# Altium PCB BLE_CAMERA_hv2.PcbDoc
Units mm, origin at the board's own origin, x right, y up, seen from the top; angles counter-clockwise.
Board outline 84 x 32 mm, 2 copper layers (Top Layer, Bottom Layer); 82 components, 53 nets, 243 pads, 235 vias.
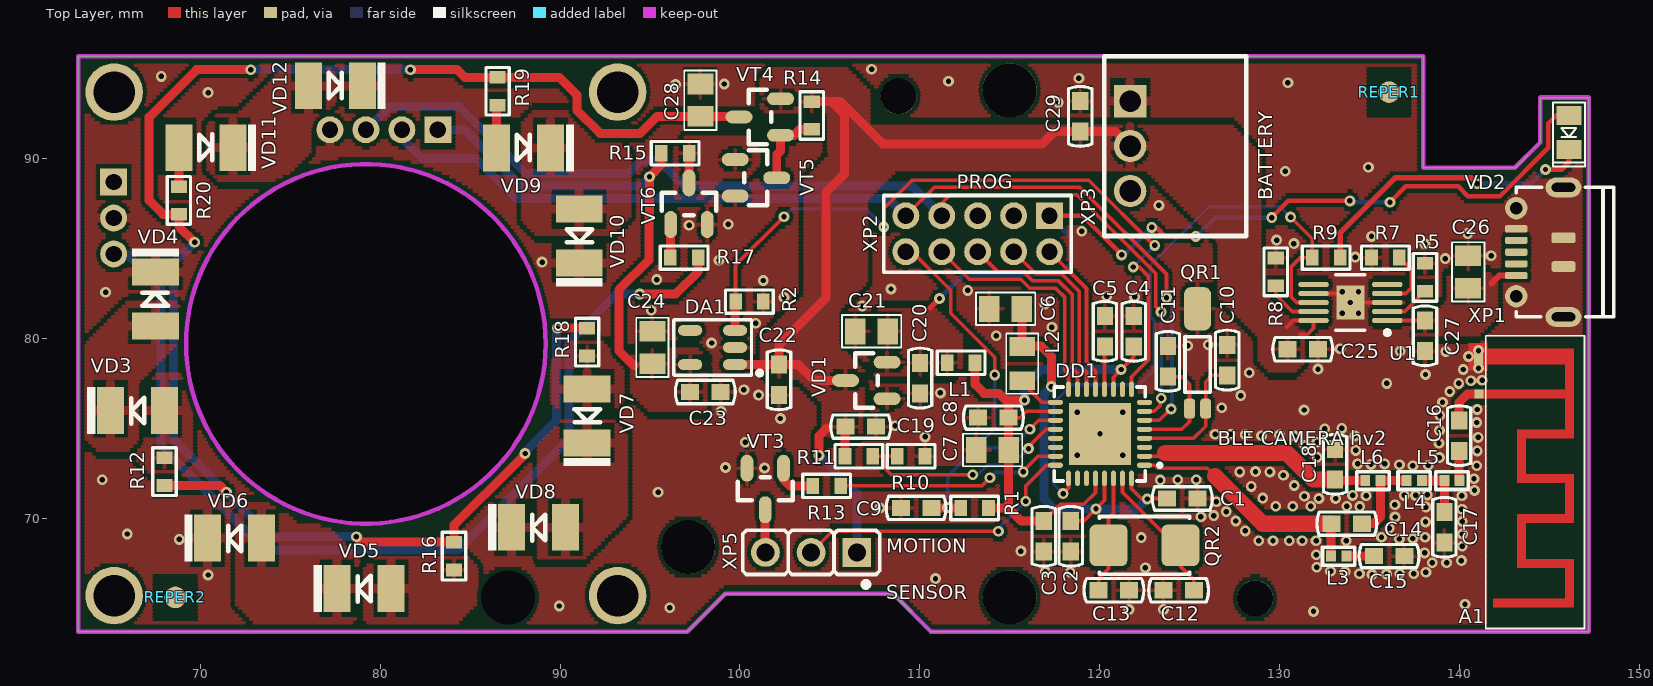
[diagram p0: Top Layer view]
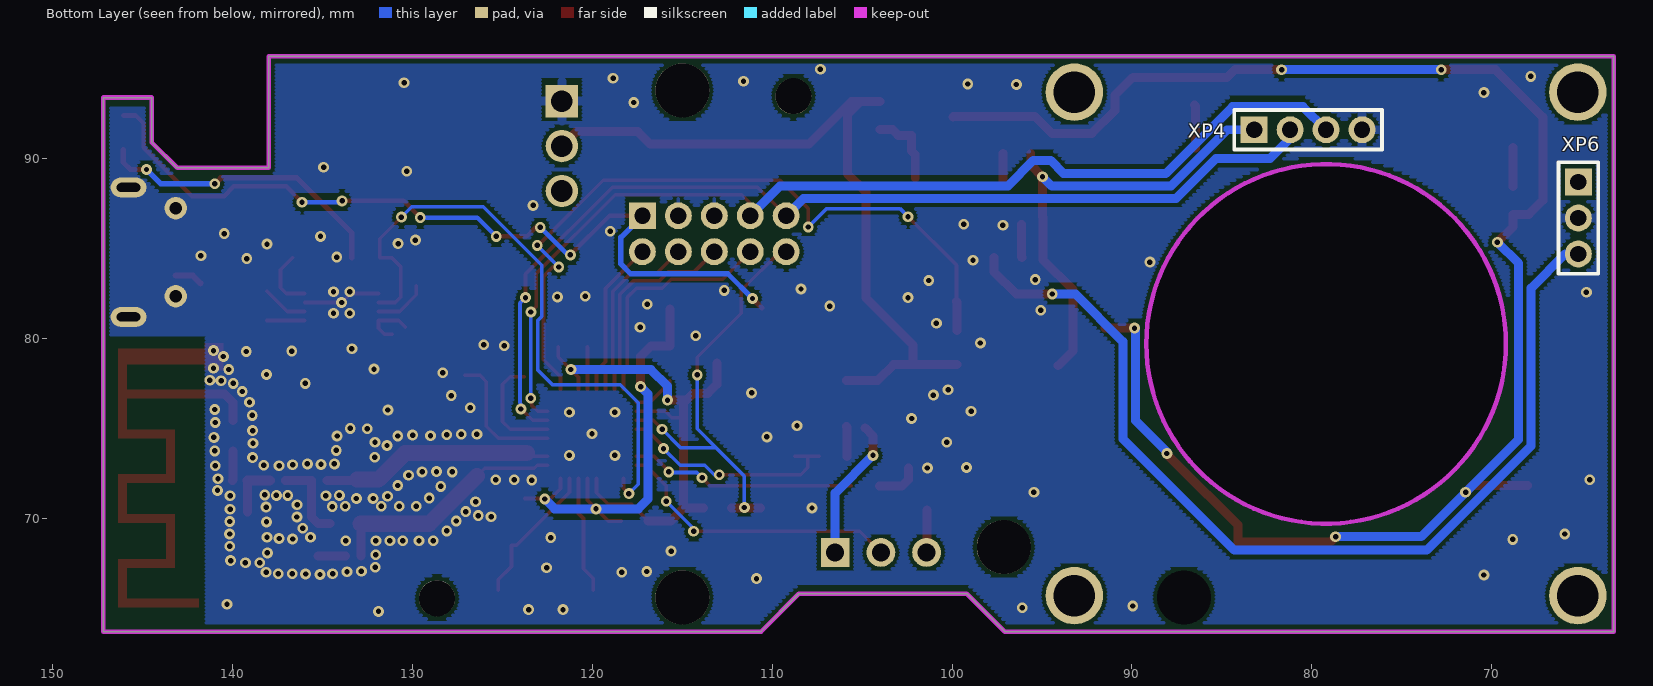
[diagram p1: Bottom Layer view, seen from below]
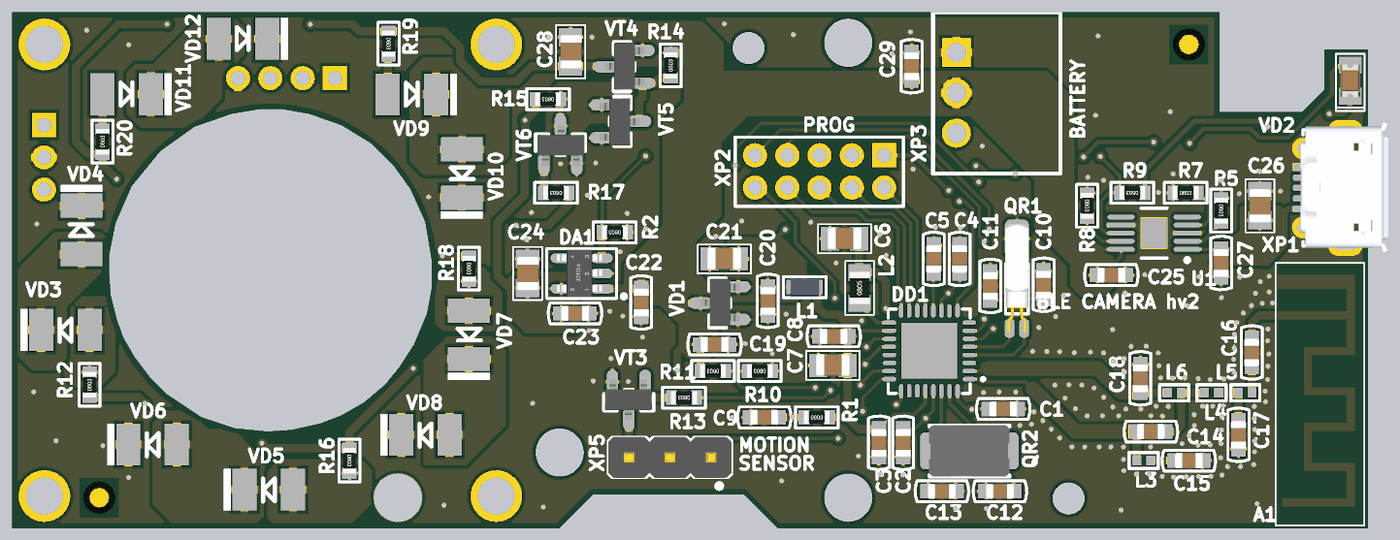
[diagram p2: 3D render of the assembled board from above, using the file's embedded part models]

## Layer stack, top to bottom
Top Solder: solder mask 0.0102, Solder Resist, Dk 3.5
Top Layer: signal copper 0.0356
Dielectric 1: dielectric 0.32, FR-4, Dk 4.8
Bottom Layer: signal copper 0.0356
Bottom Solder: solder mask 0.0102, Solder Resist, Dk 3.5

## Board outline
63.2,63.7 63.2,95.7 138,95.7 138,89.5 143.1,89.5 144.5,90.9 144.5,93.4 147.2,93.4 147.2,63.7 110.625,63.7 108.525,65.8 99.175,65.8 97.075,63.7
cut-out: 69.2,80.6 69.6,82.6 70.6,84.9 72.4,87.1 74.5,88.6 76.8,89.4 78.6,89.7 79.9,89.7 81.6,89.4 83.6,88.7 85.4,87.6 86.9,86.1 87.9,84.7 88.8,82.7 89.2,80.3 89.2,78.6 88.9,77 88.1,75.1 87.2,73.7 86.3,72.6 85,71.5 83.6,70.7 82.3,70.2 80.5,69.8 79,69.7 77,69.9 74.9,70.6 72.8,72 71.7,73.1 70.8,74.3 70.1,75.5 69.7,76.6 69.3,78.2 69.2,79.7

## Design rules (kind name [scope] priority, off if disabled: settings)
Clearance [All] p1: gap=0.2 ignorepadtopadclearanceinfootprint=FALSE
ComponentClearance [All] p1: gap=0.05 collisioncheckmode=3 verticalgap=2540 showdistances=FALSE
HoleSize [All] p1: absolutevalues=TRUE maxlimit=5 minlimit=0.025 maxpercent=80.000 minpercent=20.000
HoleToHoleClearance [All] p1: gap=0.05 allowstackedmicrovias=TRUE
MinimumSolderMaskSliver [All] p1: minsoldermaskwidth=0.05
PolygonConnect POWER [InComponent('XP3') OR InComponent('VD3')  OR InComponent('VD4') OR InComponent('VD5') OR InComponent('VD6') OR InComponent('VD7') OR InComponent('VD8') OR InComponent('VD9') OR InComponent('VD10') OR InComponent('VD11') OR InComponent('VD12') OR InComponent('XP6')  OR InComponent('XP4')] p1: connectstyle=Relief reliefconductorwidth=0.5 reliefentries=4 polygonreliefangle="90 Angle" airgapwidth=0.2
PolygonConnect DIRECT [IsVia OR InComponent('U1') AND InNet('GND') OR InComponent('XP1') AND InNet('GND')] p2: connectstyle=Direct reliefconductorwidth=0.254 reliefentries=4 polygonreliefangle="90 Angle" airgapwidth=0.254
PolygonConnect [All] p3: connectstyle=Relief reliefconductorwidth=0.2 reliefentries=4 polygonreliefangle="90 Angle" airgapwidth=0.2
RoutingVias [All] p1: holewidth=0.4 width=0.8 viastyle="Through Hole" minholewidth=0.3 minwidth=0.6 maxholewidth=0.5 maxwidth=1
ShortCircuit ShortCircuit_1 [InComponent('A1')] p1: allowed=TRUE
ShortCircuit [All] p2: allowed=FALSE
SilkToSilkClearance [All] p1: silktosilkclearance=0.05
SilkToSolderMaskClearance [IsPad] p1: minsilkscreentomaskgap=0.05 clearancetoexposedcopper=TRUE
SolderMaskExpansion [All] p1: expansion=0.102
Width [All] p1: maxlimit=5 minlimit=0.2 preferedwidth=0.5
23 further rules are at their usual default settings.

## Classes and differential pairs
component class [8]-IR_BACKLIGHT: C28 R12 R14 R15 R16 R17 R18 R19 R20 VD3 VD4 VD5 VD6 VD7 VD8 VD9 VD10 VD11 VD12 VT4 VT5 VT6
component class [7]-CONNECTORS: C29 R10 R11 R13 VT3 XP2 XP3 XP4 XP5 XP6
component class [6]-CHARGER: C25 C26 C27 R5 R7 R8 R9 U1 VD2 XP1
component class [5]-POWER: C19 C20 C21 C22 C23 C24 DA1 R2 VD1
component class [4]-RF: A1 C14 C15 C16 C17 C18 L3 L4 L5 L6 REPER1 REPER2
component class [3]-BLE: C1 C2 C3 C4 C5 C6 C7 C8 C9 C10 C11 C12 C13 DD1 L1 L2 QR1 QR2 R1

## Components (designator, comment, footprint, x,y, rotation, side; value= is the part's Value field where it differs from the comment)
A1 "Antenna Wi-Fi" Antenna_WiFi 141.1,76.9 r270 top locked
C1 "0.1uF" CC0603 124.6,71.1 r0 top
C2 "0.1uF" CC0603 118.4,69 r270 top
C3 "0.1uF" CC0603 116.9,69 r90 top
C4 "0.1uF" CC0603 121.9,80.4 r270 top
C5 "1uF" CC0603 120.3,80.398 r90 top
C6 "10uF" CC0805 114.775,81.65 r0 top
C7 "10uF" CC0805 114.05,73.8 r0 top
C8 "0.1uF" CC0603 114.1,75.6 r0 top
C9 "0.1uF" CC0603 109.8,70.575 r0 top
C10 "22pF" CC0603 127.1,78.8 r90 top
C11 "22pF" CC0603 123.8,78.726 r90 top
C12 "22pF" CC0603 124.4,66 r180 top
C13 "22pF" CC0603 120.8,66 r0 top
C14 "1pF" CC0603 133.75,69.7 r0 top
C15 "6.8pF" CC0603 136.1,67.9 r180 top
C16 "12pF" CC0603 140,74.6 r90 top
C17 "1pF" CC0603 139.175,69.5 r270 top
C18 "1pF" CC0603 133.1,73 r90 top
C19 "1uF" CC0603 106.72,75.1 r180 top
C20 "1uF" CC0603 110.02,77.8 r90 top
C21 "10uF" CC0805 107.32,80.4 r0 top
C22 "1uF" CC0603 102.175,77.7 r90 top
C23 "1uF" CC0603 98.075,77.025 r180 top
C24 "10uF" CC0805 95.132,79.5 r270 top
C25 "1uF" CC0603 131.3,79.4 r0 top
C26 "10uF" CC0805 140.5,83.7 r270 top
C27 "0.1uF" CC0603 138.1,80.15 r90 top
C28 "10uF" CC0805 97.8,93.25 r270 top
C29 "0.1uF" CC0603 118.925,92.35 r90 top
DA1 "AP2139-3.3" SOT23-5 98.457,79.5 r0 top
DD1 "CC2650" QFN32_TI 122.5,72.95 r180 top
L1 "BLM18HE152SN1" L0603 112.3,78.65 r0 top
L2 "10uH" RC0805 115.7,78.6 r90 top
L3 "2.4nH" L0402 133.3,67.9 r180 top
L4 "2nH" L0402 137.5,72.1 r0 top
L5 "2nH" L0402 139.6,72.1 r0 top
L6 "2.4nH" L0402 135.2,72.1 r0 top
QR1 "MS3V-T1R" MS3V-T1R 125,76.1 r90 top
QR2 "SJK-6L-24.0" AC5032_2 122.5,68.5 r180 top
R1 "100k" RC0603 113.05,70.575 r0 top
R2 "470k" RC0603 100.532,82.05 r180 top
R5 "1k" RC0603 138.1,83.4 r270 top
R7 "2k" RC0603 135.9,84.5 r0 top
R8 "10k" RC0603 129.8,83.7 r270 top
R9 "1k" RC0603 132.6,84.5 r180 top
R10 "470k" RC0603 109.52,73.45 r180 top
R11 "470k" RC0603 106.62,73.45 r180 top
R12 "10E" RC0603 68,72.6 r90 top
R13 "47k" RC0603 104.824,71.8 r180 top
R14 "10k" RC0603 104,92.4 r90 top
R15 "100k" RC0603 96.4,90.3 r180 top
R16 "10E" RC0603 84.1,67.9 r270 top
R17 "100k" RC0603 96.9,84.5 r180 top
R18 "10E" RC0603 91.5,79.8 r270 top
R19 "10E" RC0603 86.525,93.75 r270 top
R20 "10E" RC0603 68.8,87.675 r90 top
REPER1 "REPER1.2" REPER1.2 136.1,93.7 r90 top
REPER2 "REPER1.2" REPER1.2 68.6,65.6 r90 top
U1 "BQ24092DGQR" DGQ10-1675X1445TP_N 133.95,82 r180 top
VD1 "AP2138-3.3" SOT-23(123) 107.02,77.7 r0 top
VD2 "LED_0805" LED0805 146.1,91.5 r90 top
VD3 "SFH4211-Z" LED_3528 68,76 r270 top
VD4 "SFH4211-Z" LED_3528 67.5,80.7 r180 top
VD5 "SFH4211-Z" LED_3528 80.6,66.1 r270 top
VD6 "SFH4211-Z" LED_3528 73.4,68.9 r270 top
VD7 "SFH4211-Z" LED_3528 91.5,77.2 r0 top
VD8 "SFH4211-Z" LED_3528 90.3,69.5 r270 top
VD9 "SFH4211-Z" LED_3528 86.475,90.6 r90 top
VD10 "SFH4211-Z" LED_3528 91.062,87.2 r0 top
VD11 "SFH4211-Z" LED_3528 68.8,90.612 r90 top
VD12 "SFH4211-Z" LED_3528 76,94.05 r90 top
VT3 "BC817-40" SOT-23(123) 101.375,71.625 r90 top
VT4 "IRLML6402" SOT-23(123) 101.1,92.35 r0 top
VT5 "BC817-40" SOT-23(123) 100.9,88.9 r180 top
VT6 "BC817-40" SOT-23(123) 97.2,87.5 r270 top
XP1 "KLS1-238" KLS1-238 145.725,84.775 r0 top locked
XP2 "PLD2-10" PLD2-10 117.225,86.8 r270 top
XP3 "MW03R" MW03R 121.7,93.2 r270 top locked
XP4 "n.p" PLS2-04 83.194,91.61 r180 bottom locked
XP5 "n.p" PLS-03 106.5,68.1 r180 top
XP6 "PLS2-03" PLS2-03 65.175,88.7 r270 bottom locked value=n.p

## Footprints (in the part's own frame and the unit in brackets; to place one, negate y for a bottom-side part, rotate by r counter-clockwise, add the part's x,y. Pads: shape width x height; smd on the part's side, far side on the other; paste and mask are expansions set on the pad)
AC5032_2 [mm]
  rrect30% 2.1x2.3 smd mask+0.05: 1(-2,0) 2(2,0)
  silkscreen extent -2.5,-1.6 2.5,1.6, body extent -2.5,-1.6 2.5,1.6, height 1.2
Antenna_WiFi [mm] "2.43Ghz 2.5dBi"
  rect 0.5x0.5 smd paste-10 mask+0.05: 1(0,0)
  rect 0.9x0.5 smd paste-10 mask+0.05: 2(-2.1,-0.025)
  Top Layer region: -2.55,0.1 -1.65,0.1 -1.65,4.9 -2.55,4.9
  Top Layer region: -2.55,4.775 2.45,4.775 2.45,5.275 -2.55,5.275
  Top Layer region: -0.25,-0.2 0.25,-0.2 0.25,4.9 -0.25,4.9
  Top Layer region: 1.95,2.125 2.45,2.125 2.45,4.9 1.95,4.9
  Top Layer region: 2.3,2.125 4.6,2.125 4.6,2.625 2.3,2.625
  Top Layer region: 4.45,2.125 4.95,2.125 4.95,4.9 4.45,4.9
  Top Layer region: 4.45,4.775 7.15,4.775 7.15,5.275 4.45,5.275
  Top Layer region: 6.65,2.125 7.15,2.125 7.15,5 6.65,5
  Top Layer region: 6.9,2.125 9.4,2.125 9.4,2.625 6.9,2.625
  Top Layer region: 9.15,2.125 9.65,2.125 9.65,4.9 9.15,4.9
  Top Layer region: 9.15,4.775 11.85,4.775 11.85,5.275 9.15,5.275
  Top Layer region: 11.35,0.775 11.85,0.775 11.85,5 11.35,5
  silkscreen extent -3.25,0.38 13.03,5.87
CC0603 [mm]
  rect 1x0.9 smd paste-25.4 mask+0.05: 1(-0.85,0) 2(0.85,0)
  silkscreen extent -1.66,-0.65 1.66,0.65, body extent -0.87,-0.47 0.88,0.48, height 0.85
CC0805 [mm]
  rect 1.15x1.45 smd paste-25.4 mask+0.05: 1(-0.9,0) 2(0.9,0)
  silkscreen extent -1.65,-0.9 1.65,0.9, body extent -1.05,-0.65 1.05,0.7, height 1.1
DGQ10-1675X1445TP_N [mm] "TSSOP, 10-Leads, Body 3x3mm, Pitch 0.5mm, Thermal Pad 1.88x1.57mm, IPC Medium Density"
  oval 1.7x0.3 smd mask+0.05: 1(-2.05,1) 2(-2.05,0.5) 3(-2.05,0) 4(-2.05,-0.5) 5(-2.05,-1) 6(2.05,-1) 7(2.05,-0.5) 8(2.05,0) 9(2.05,0.5) 10(2.05,1)
  rect 1.57x1.88 smd mask+0.05: 11(0,0)
  silkscreen extent -2.17,-1.55 0.8,1.8, body extent -1.55,-1.55 1.55,1.55, height 1.1
KLS1-238 [mm]
  rrect50% 1.25x0.4 smd mask+0.05: 1(-2.55,-1.275) 2(-2.55,-0.625) 3(-2.55,0.025) 4(-2.55,0.675) 5(-2.55,1.325)
  round 1.25 hole 0.7 mask+0.05: 6(-2.55,-2.425) 6(-2.55,2.475)
  oval 2x1.1 hole 0.5 slot 1.3 at 0 deg mask+0.05: 6(0.075,-3.575) 6(0.075,3.625)
  rrect50% 1.35x0.6 smd mask+0.05: 6(0.075,-0.775) 6(0.075,0.825)
  silkscreen extent -2.55,-3.57 2.87,3.63, body extent -2.7,-4.02 2.73,4.18, height 2.68
L0402 [mm]
  rect 0.55x0.6 smd mask+0.05: 1(-0.425,0) 2(0.425,0)
  silkscreen extent -0.9,-0.5 0.9,0.5
L0603 [mm]
  rect 0.7x0.9 smd paste-25.4 mask+0.05: 1(-0.775,0) 2(0.774,0)
  silkscreen extent -1.32,-0.65 1.33,0.65, body extent -0.9,-0.58 0.9,0.54, height 1
LED0805 [mm]
  rect 1.05x1.4 smd paste-25.4 mask+0.05: 1(0.9,0) 2(-1,0)
  silkscreen extent -1.93,-0.89 1.62,0.89, body extent -1.06,-0.62 0.96,0.63, height 1.1
LED_3528 [mm]
  rect 2.6x1.5 smd mask+0.05: 1(0,0) 2(0,-3)
  silkscreen extent -1.3,-4.3 1.3,-1.12, body extent -1.3,-3.03 1.3,0.2, height 2.1
MS3V-T1R [mm]
  rrect50% 1.1x0.6 smd mask+0.05: 1(0,0) 2(0,-0.9)
  rrect50% 2.4x1.5 smd mask+0.05: 3(5.55,-0.45)
  silkscreen extent 0.9,-1.15 4,0.25, body extent -0.25,-1.19 6.45,0.29, height 1.48
MW03R [mm]
  rect 1.8x1.8 hole 1.2 mask+0.05: 1(0,0)
  round 1.8 hole 1.2 mask+0.05: 2(2.5,0) 3(5,0)
  silkscreen extent -2.5,-1.45 7.5,6.45
PLD2-10 [mm]
  rect 1.5x1.5 hole 0.9 mask+0.05: 1(-0.025,0)
  round 1.5 hole 0.9 mask+0.05: 2(1.975,0) 3(-0.025,-2) 4(1.975,-2) 5(-0.025,-4) 6(1.975,-4) 7(-0.025,-6) 8(1.975,-6) 9(-0.025,-8) 10(1.975,-8)
  silkscreen extent -1.15,-9.23 3.13,1.2
PLS2-03 [mm]
  rect 1.5x1.5 hole 0.9 mask+0.05: 1(0,0)
  round 1.5 hole 0.9 mask+0.05: 2(2,0) 3(4,0)
  silkscreen extent -1.1,-1.1 5.1,1.1
PLS2-04 [mm]
  rect 1.5x1.5 hole 0.9 mask+0.05: 1(-0.006,-0.002)
  round 1.5 hole 0.9 mask+0.05: 2(1.994,-0.002) 3(3.994,-0.002) 4(5.994,-0.002)
  silkscreen extent -1.11,-1.1 7.1,1.1
PLS-03 [mm]
  rect 1.6x1.6 hole 1 mask+0.05: 1(0,0)
  round 1.6 hole 1 mask+0.05: 2(2.54,0) 3(5.08,0)
  silkscreen extent -1.27,-1.23 6.35,1.93, body extent -1.27,-1.27 6.35,1.27, height 10.1
QFN32_TI [mm]
  oval 0.85x0.28 smd mask+0.05: 1(0,0) 2(0,-0.5) 3(0,-1) 4(0,-1.5) 5(0,-2) 6(0,-2.5) 7(0,-3) 8(0,-3.5) 17(4.95,-3.5) 18(4.95,-3) 19(4.95,-2.5) 20(4.95,-2) 21(4.95,-1.5) 22(4.95,-1) 23(4.95,-0.5) 24(4.95,0)
  oval 0.28x0.85 smd mask+0.05: 9(0.725,-4.225) 10(1.225,-4.225) 11(1.725,-4.225) 12(2.225,-4.225) 13(2.725,-4.225) 14(3.225,-4.225) 15(3.725,-4.225) 16(4.225,-4.225) 25(4.225,0.725) 26(3.725,0.725) 27(3.225,0.725) 28(2.725,0.725) 29(2.225,0.725) 30(1.725,0.725) 31(1.225,0.725) 32(0.725,0.725)
  rect 3.45x3.45 smd mask+0.05: 33(2.475,-1.75)
  silkscreen extent -0.95,-4.35 5.02,0.87
RC0603 [mm]
  rect 0.7x0.9 smd paste-25.4 mask+0.05: 1(-0.775,0) 2(0.774,0)
  silkscreen extent -1.32,-0.65 1.33,0.65, body extent -0.8,-0.4 0.8,0.4, height 0.45
RC0805 [mm]
  rect 1.05x1.4 smd paste-25.4 mask+0.05: 1(-0.95,0) 2(0.95,0)
  silkscreen extent -1.67,-0.89 1.67,0.89, body extent -1,-0.62 1,0.63, height 0.6
REPER1.2 [mm]
  round 1.2 smd paste-25.4 mask+0.05: 1(0,0)
  Top Layer pour cut-out: -1.35,-1.325 1.325,-1.325 1.325,1.325 -1.35,1.325
SOT23-5 [mm]
  oval 1.35x0.6 smd mask+0.05: 1(1.275,-0.95) 2(1.275,0) 3(1.275,0.95) 4(-1.225,0.95) 5(-1.225,-0.95)
  silkscreen extent -2.13,-1.55 2.77,1.55, body extent -1.5,-1.42 1.3,1.47, height 1.09
SOT-23(123) [mm]
  oval 1.5x0.713 smd mask+0.05: 1(1.162,-1.05) 2(1.162,0.982) 3(-1.149,-0.034)
  silkscreen extent -0.62,-1.56 0.65,1.49, body extent -1.18,-1.46 1.3,1.46, height 1

## Part data
A1: "2.43GHz"
C1 C2 C3 C4 C5 C8 C9 C10 C11 C12 C13 C14 C15 C16 C17 C18 C19 C20 C22 C23 C25 C27 C29: library part CC0603, "CC0603"
C6 C7 C21 C24 C26 C28: library part CC0805, "CC0805"
DA1: library part AP2139
DD1: library part CC2650RHB, "CC2650RHBT"
L1: library part L0603, "L0603"
L2: library part L0805, "L0805"
L3 L4 L5 L6: library part L0402, "L0402"
QR1: "CRYSTAL_32768 Hz"
QR2: library part AC5032_2, "AC5032/2"
R1 R2 R5 R7 R8 R9 R10 R11 R12 R13 R14 R15 R16 R17 R18 R19 R20: library part RC0603, "RC0603"
U1: "1 A, Single-Input, Single-Cell Li-Ion Battery Charger with Operation Over JEITA and 10 k ohm NTC, 4.5 V, -40 to 150 degC, 10-pin MSOP-PowerPAD (DGQ), Green (RoHS & no Sb/Br)", Manufacturer="Texas Instruments", Over Voltage Protection=N, Supplier Part Number 1=BQ24092DGQR-ND, Code_JEDEC=MO-187-BA-T, ComponentLink1Description=Datasheet, ComponentLink1URL=http://www.ti.com/general/docs/lit/getliterature.tsp?genericPartNumber=BQ24092&fileType=pdf, DatasheetVersion=SLUS968C, Eco-Plan="Green (RoHS & no Sb/Br)", Lead Acid=N, Li-Ion=N, Li-Polymer=N, Mounting Technology="Surface Mount", NiCd=N, NiMH=N, PackageDescription="10-Pin PowerPAD Plastic Small Outline 0.5 mm Pitch, Exposed Pad", PackageReference=DGQ10-1675X1445TP, PackageVersion="revF, Nov-2011", PartNumber=BQ24092DGQR, SubFamily="Battery Charge Management", Supplier 1=Digi-Key, Supplier 2=Newark, Supplier 3=Mouser, Supplier Part Number 2=79R7874, Supplier Part Number 3=595-BQ24092DGQR, Vin(Min)(V)=4.5
VD1: library part AP2138
VD3 VD4 VD5 VD6 VD7 VD8 VD9 VD10 VD11 VD12: library part LED_3528
VT3 VT5 VT6: library part BC846BLT1, "NPN 500ma transistor", ComponentField7="Published 29-Sep-2000", OriginalName=BC846BLT1
VT4: "HEXFET Power MOSFET", ComponentField7="Published 8-Jun-2000", OriginalName=IRLML5103
XP1: library part "MicroUSB KLS1-238"
XP4: library part PLS2-04, "PLS2-04"
XP5: library part PLS03, "PLS03"

## Free pads (board coordinates)
  round 3.2 hole 2.3 mask+0.05: 0(65.2,65.7) 0(65.2,93.7) 0(93.2,65.7) 0(93.2,93.7)
  round 1.524 hole 3 mask+0.05: 0(87.1,65.6)
  round 3 hole 3 unplated mask+0.05: 0(97.125,68.4) 0(115,65.6) 0(115,93.8)
  round 2 hole 2 unplated mask+0.05: 0(108.825,93.475) 0(128.65,65.55)

## Via types
v1: diameter 0.6, hole 0.3, Top Layer to Bottom Layer, tented both sides, 235 vias

## Nets (pads, with @x,y where several pads share a name; then routed paths per layer and width w, separated by ;. In a path a pad name is that pad's centre, name@x,y a point inside that pad or via, vN(x,y) a via of type N, cw(c..) or ccw(c..) an arc to the next point about the centre after c; other vN are vias at no path point)
+3V3: C20.2 C21.2 L1.1 VD1.2 VD2.1 XP2.1 | length 46.7
  Top Layer w0.254: XP2.1 119.05,86.825 v1(121.225,84.65) ; v1(122.906,86.179) 123.146,86.179 123.65,85.675 v1(125.35,85.675) ; v1(129.575,86.725) 130.5,87.65 v1(133.925,87.65) ; v1(136.15,87.575) 137.032,88.457 139.943,88.457 140.482,87.918 142.268,87.918 144.954,90.604 144.954,91.954 145.4,92.4 VD2.1
  Top Layer w0.3: 110.575,81.7 v1(111.1,82.225)
  Bottom Layer w0.254: v1(121.225,84.65) 121.375,84.65 122.904,86.179 v1(122.906,86.179) ; v1(125.35,85.675) 126.4,86.725 v1(129.575,86.725) ; v1(133.925,87.65) 134,87.575 v1(136.15,87.575)
  Bottom Layer w0.3: v1(111.1,82.225) 112.475,83.6 117.875,83.6 118.425,84.15 118.425,85.625 XP2.1
+3V3_CAM: C23.2 C24.2 DA1.5 R15.2 XP4.1 | length 26.4
  Top Layer w0.5: 94.107,78.497 93.275,79.329 93.275,82.7 94.95,84.375 94.95,86.725 94.975,86.75 v1(94.975,89) 95.626,89.651 R15.2
  Bottom Layer w0.5: XP4.1 84.707,91.608 87.84,88.475 94.45,88.475 v1(94.975,89)
+3V3_F: C3.2 C4.2 C7.2 C8.2 DD1.11 DD1.18 DD1.28 L1.2 R1.2 | length 30.2
  Top Layer w0.2: C8.2 115.587,75.6 115.937,75.95 DD1.18 ; C3.2 117.825,70.775 119.125,70.775 119.775,71.425 DD1.28 ; DD1.11 120.775,77.85 121.9,78.975 C4.2
  Top Layer w0.5: L1.2 113.074,77.451 113.575,76.95 114.4,76.95 114.775,76.575 ; R1.2 114.925,70.575 114.95,70.55 ; v1(115.825,76.575) 114.775,76.575 ; C3.2 115.65,69.85 114.95,70.55 ; 114.775,76.575 114.95,76.4 C8.2 C7.2 114.95,70.55
  Bottom Layer w0.5: v1(115.825,76.575) 115.825,77.35 116.75,78.275 v1(121.2,78.275)
+VBAT: C19.2 C22.2 C25.1 C29.1 DA1.1 R11.2 R14.2 U1.10 VD1.3 VT4.2 XP3.2 XP5.1 | length 54.8
  Top Layer w0.2: 130.4,80.625 130.775,81 U1.10 131.9,80.575 131.55,80.225 131.15,80.225
  Top Layer w0.5: DA1.1 C22.2 ; R14.2 105.101,93.174 ; v1(104.4,73.5) 104.4,74.59 104.835,75.025 ; R11.2 105.846,75.075 C19.2 ; VD1.3 104.137,77.666 103.253,78.55 C22.2 ; XP3.2 120.9,91.5 C29.1 117.475,91.5 116.8,90.825 107.95,90.825 105.6,93.174 105.101,93.174 ; C22.2 102.175,79.65 104.775,82.25 104.775,88.125 105.825,89.175 105.825,92.45 105.101,93.174
  Bottom Layer w0.5: v1(104.4,73.5) 106.5,71.4 XP5.1
+VBUS: C26.2 C27.2 U1.1 XP1.1 | length 3.7
  Top Layer w0.2: U1.1 C27.2
  Top Layer w0.35: 141.8,83.075 142.225,83.5 XP1.1
BAT_MEAS: DD1.20 R10.2 R11.1 | length 12.8
  Top Layer w0.2: R11.1 108.025,73.45 ; R10.2 108.025,73.45 ; v1(112.95,72.425) 108.425,72.425 108.025,72.825 108.025,73.45 ; v1(116.05,73.875) 116.05,73.975 117.025,74.95 DD1.20
  Bottom Layer w0.2: v1(112.95,72.425) 113.226,72.425 113.749,72.948 115.123,72.948 v1(116.05,73.875)
BAT_STAT: DD1.25 R9.2 U1.8 | length 35.1
  Top Layer w0.2: v1(117.975,71.375) 118.275,71.675 DD1.25 ; v1(130.625,86.75) 131.826,85.549 R9.2 131.175,84.5 130.65,83.975 130.65,82.325 130.975,82 U1.8
  Bottom Layer w0.2: v1(117.975,71.375) 117.45,71.9 117.45,76.425 118.45,77.425 122.225,77.425 123.031,78.231 123.031,81.02 122.825,81.226 122.825,84.075 126.075,87.325 130.05,87.325 v1(130.625,86.75)
BT_RX: DD1.7 XP2.7 XP4.3 | length 58.8
  Top Layer w0.2: XP2.7 111.225,87.525 111.7,88 118.741,88 123.125,83.616 123.125,81.775 v1(123.425,81.475) ; DD1.7 123.05,75.95 123.375,76.275 123.375,76.623 v1(123.431,76.679)
  Bottom Layer w0.2: v1(123.425,81.475) 123.431,81.469 v1(123.431,76.679)
  Bottom Layer w0.5: XP4.3 80.492,92.9 84.405,92.9 88.13,89.175 93.8,89.175 94.525,89.9 95.475,89.9 96.9,88.475 109.575,88.475 XP2.7
BT_TX: DD1.6 XP2.9 XP4.2 | length 56.8
  Top Layer w0.2: XP2.9 110.8,88.4 118.906,88.4 123.725,83.581 v1(123.725,82.275) ; DD1.6 123.325,75.45 123.954,76.079 v1(123.981,76.079)
  Bottom Layer w0.2: v1(123.725,82.275) 124.031,81.969 124.031,76.43 123.981,76.38 v1(123.981,76.079)
  Bottom Layer w0.5: XP4.2 81.2,91.125 82.325,90 85.325,90 87.55,87.775 108.275,87.775 XP2.9
CAM_EN: DA1.3 DD1.9 R2.2 | length 41.3
  Top Layer w0.2: R2.2 99.758,84.083 v1(102.45,86.775) ; v1(108,86.2) 108,87.225 109.575,88.8 119.403,88.8 123.028,85.175 v1(123.075,85.175) ; DD1.9 121.775,77.872 122.725,78.822 122.725,83.45 122.2,83.975 v1(121.875,83.975)
  Top Layer w0.5: DA1.3 99.732,82.024 R2.2
  Bottom Layer w0.2: v1(102.45,86.775) 102.9,87.225 106.975,87.225 v1(108,86.2) ; v1(121.875,83.975) v1(123.075,85.175)
EX_T: DD1.24 XP5.2 | length 16.2
  Top Layer w0.2: XP5.2 105.135,69.275 v1(114.375,69.275) ; v1(115.9,70.95) 115.9,71.8 117.05,72.95 DD1.24
  Bottom Layer w0.2: v1(114.375,69.275) 114.375,69.425 v1(115.9,70.95)
EX_T_P: DD1.23 R13.1 | length 12.7
  Top Layer w0.2: R13.1 113.45,71.8 v1(113.9,72.25) ; v1(115.756,72.579) 115.756,72.631 116.575,73.45 DD1.23
  Bottom Layer w0.2: v1(113.9,72.25) 114.198,72.548 115.725,72.548 v1(115.756,72.579)
GND: A1.2 C1.2 C2.2 C3.1 C4.1 C5.2 C6.1 C7.1 C8.1 C9.1 C10.2 C11.2 C12.2 C13.2 C15.1 C17.2 C18.2 C19.1 C20.1 C21.1 C22.1 C23.1 C24.1 C25.2 C26.1 C27.1 C28.1 C29.2 DA1.2 DD1.33 QR1.3 R2.1 R5.1 R7.1 R8.1 R10.1 U1.3 U1.7 U1.11 VD1.1 VD4.2 VD6.2 VD8.2 VD10.2 VD12.2 VT3.2 VT5.2 VT6.2 XP1.5 XP1.6 XP2.3 XP2.5 XP3.1 XP4.4 XP6.2 | length 4.3
  Top Layer w0.2: U1.7 133.45,82.5 v1(133.95,82) U1.3
  other v1: 131.9,64.825 121.637,64.925 123.55,64.925 96.1,65.025 89.95,65.125 140.325,65.225 110.875,66.647 70.425,66.85 135.15,66.875 135.95,66.9 134.45,66.917 136.7,66.917 137.475,66.917 118.375,67 138.15,67 116.975,67.042 133.65,67.025 132.85,67.058 122.55,67.25 132.075,67.275 138.5,67.525 139.3,67.525 140.125,67.65 132.05,67.975 138.075,68.075 115.625,68.175 140.175,68.45 128.85,68.75 129.646,68.75 130.55,68.75 131.266,68.75 132.041,68.75 133.725,68.75 68.825,68.825 136.674,68.85 137.425,68.875 122.325,68.925 135.682,68.95 138.1,68.95 65.925,69.125 140.18,69.125 128.1,69.3 136.116,69.45 138.125,69.8 140.175,69.825 127.575,69.85 125.638,70.082 136.434,70.075 126.35,70.15 127.05,70.375 140.15,70.5 107.789,70.575 134.475,70.65 138.15,70.625 129.8,70.675 130.75,70.675 131.75,70.675 133.75,70.675 136.425,70.75 126.5,70.925 132.2,71.1 133.125,71.1 129.075,71.125 131.39,71.225 134.825,71.25 140.15,71.25 134.075,71.275 136.95,71.275 137.575,71.275 138.225,71.3 95.45,71.45 140.85,71.55 128.436,71.775 130.825,71.825 123.375,72.125 64.534,72.15 124.35,72.15 125.375,72.15 140.825,72.2 130.225,72.4 127.8,72.582 128.675,72.6 129.475,72.582 101.375,72.8 99.2,72.825 137.425,72.925 140.975,72.925 138.275,72.95 136.675,72.975 135.094,73 134.35,73.025 135.85,73.025 138.9,73.374 132.108,73.4 118.75,73.5 121.28,73.5 141,73.75 134.25,73.775 131.426,74.05 138.875,74.175 100.3,74.225 132.091,74.225 141.05,74.5 110.3,74.525 130.825,74.575 134.2,74.575 129.008,74.59 130,74.625 128.1,74.65 126.425,74.675 127.3,74.67 120.025,74.7 138.9,74.875 132.525,74.975 133.463,75 108.625,75.15 140.975,75.325 102.25,75.55 138.925,75.725 118.75,75.9 121.28,75.9 98.941,75.95 131.375,76.025 141,76.05 126.8,76.15 139.075,76.45 127.85,76.825 101.041,76.85 111.15,76.975 139.475,77.05 100.225,77.15 135.975,77.5 139.972,77.5 140.65,77.65 141.275,77.675 138.125,78 128.325,78.1 140.225,78.276 132.15,78.3 141.075,78.35 140.525,79 139.248,79.275 136.724,79.3 141.075,79.325 133.375,79.425 124.9,79.6 126.05,79.65 98.425,79.75 114.25,80.15 117.35,80.625 100.875,80.85 133.5,81.4 134.4,81.4 95.075,81.575 106.8,81.8 116.95,81.9 102.45,82.275 121.95,82.312 120.4,82.35 64.725,82.575 133.5,82.6 134.4,82.6 112.675,82.675 108.4,82.75 101.3,83.225 95.37,83.275 89,84.25 98.835,84.35 139.225,84.441 134.225,84.525 141.775,84.606 138.1,85.25 130.809,85.275 129.846,85.47 135.125,85.675 140.475,85.833 119.016,85.96 97.175,86.3 99.35,86.35 123.3,87.4 130.325,89.3 134.95,89.525 117.7,93.125 70.425,93.675 96.425,94.125 99.125,94.15 130.475,94.225 111.6,94.3 118.85,94.475 67.825,94.575 107.325,94.975
JTAG_TCK: DD1.14 XP2.4 | length 10.2
  Top Layer w0.2: XP2.4 116.45,83.6 117.884,83.6 118.875,82.609 118.875,78.534 119.275,78.134 DD1.14
JTAG_TDI: DD1.16 XP2.8 | length 13.1
  Top Layer w0.2: XP2.8 112.75,83.3 115.619,83.3 116.119,82.8 117.55,82.8 118.075,82.275 118.075,78.203 118.275,78.003 DD1.16
JTAG_TDO: DD1.15 XP2.6 | length 11.6
  Top Layer w0.2: XP2.6 114.35,83.7 115.784,83.7 116.284,83.2 117.719,83.2 118.475,82.444 118.475,78.369 118.775,78.069 DD1.15
JTAG_TMS: DD1.13 XP2.2 | length 8.7
  Top Layer w0.2: XP2.2 119.275,82.775 119.275,78.7 119.775,78.2 DD1.13
NetA1_1: A1.1 C16.2 | length 2.3
  Top Layer w0.5: C16.2 140,76.45 140.45,76.9 A1.1
NetC1_1: C1.1 C2.1 C6.2 DD1.29 DD1.32 L2.2 | length 24.6
  Top Layer w0.2: C2.1 119.125,69.85 120.275,71 DD1.29 ; DD1.32 121.775,71.65 122.325,71.1 C1.1
  Top Layer w0.5: C6.2 115.675,79.575 116.75,79.575 117.325,79 v1(117.325,77.325)
  Bottom Layer w0.5: v1(117.325,77.325) 116.9,76.9 116.9,71.075 117.45,70.525 v1(119.8,70.525) 122.1,70.525 v1(122.65,71.075)
NetC5_1: C5.1 DD1.12 | length 2.4
  Top Layer w0.2: DD1.12 120.275,79.523 C5.1
NetC12_1: C12.1 DD1.31 QR2.1 | length 8
  Top Layer w0.2: DD1.31 121.275,71.45 124.225,68.5 QR2.1 124.5,67.325 125.25,66.575 C12.1
NetC13_1: C13.1 DD1.30 QR2.2 | length 6.6
  Top Layer w0.2: C13.1 119.95,66.65 120.5,67.2 QR2.2 120.5,69.991 120.775,70.266 DD1.30
NetC14_2: C14.2 L4.1 L6.2 | length 4.7
  Top Layer w0.5: C14.2 135.25,69.7 135.625,70.075 L6.2 L4.1
NetC15_2: C15.2 L3.1 | length 1.5
  Top Layer w0.5: L3.1 C15.2
NetC16_1: C16.1 L5.2 | length 1.7
  Top Layer w0.5: C16.1 140,72.125 L5.2
NetC17_1: C17.1 L4.2 L5.1 | length 3
  Top Layer w0.5: C17.1 L5.1
  Top Layer w0.55: L4.2 L5.1
NetC28_2: C28.2 R12.1 R16.1 R18.1 R19.1 R20.1 VT4.3 | length 93.8
  Top Layer w0.5: R12.1 71.067,71.825 v1(71.442,71.45) ; v1(69.675,85.35) 68.8,86.225 R20.1 67.925,86.9 67.15,87.675 67.15,92.313 69.787,94.95 v1(72.8,94.95) ; v1(78.675,68.975) 78.975,68.675 R16.1 84.1,69.625 85.767,71.292 85.78,71.292 88.054,73.567 v1(88.054,73.604) ; v1(81.675,94.95) 84.275,94.95 84.7,94.525 R19.1 89.95,94.525 90.95,93.525 90.95,92.675 92.225,91.4 94.45,91.4 95.4,92.35 C28.2 99.917,92.35 VT4.3 ; v1@89.825,80.55 v1@89.85,80.575 ; v1(89.854,80.579) v1@89.85,80.575 ; R18.1 v1@89.85,80.575
  Bottom Layer w0.5: v1(69.675,85.35) 68.5,84.175 68.5,74.392 v1(71.442,71.45) 73.917,68.975 v1(78.675,68.975) ; v1(72.8,94.95) v1(81.675,94.95) ; v1(88.054,73.604) 88.054,73.695 89.798,75.439 89.798,80.573 89.848,80.573 v1(89.854,80.579)
NetDD1_17: DD1.17 L2.1 | length 2.4
  Top Layer w0.2: L2.1 115.7,77.55 116.8,76.45 DD1.17
NetR5_2: R5.2 U1.2 | length 2.6
  Top Layer w0.2: U1.2 136.975,81.5 R5.2
NetR7_2: R7.2 U1.4 | length 3.4
  Top Layer w0.2: U1.4 137.025,82.5 137.35,82.825 137.35,83.824 R7.2
NetR8_2: R8.2 U1.9 | length 3
  Top Layer w0.2: R8.2 129.8,82.425 130.725,81.5 U1.9
NetR9_1: R9.1 VD2.2 | length 16.7
  Top Layer w0.3: R9.1 133.375,85.875 136.434,88.934 140.666,88.934 v1(141,88.6) ; v1(144.8,89.4) 145.7,89.4 146.1,89.8 VD2.2
  Bottom Layer w0.3: v1(141,88.6) 144,88.6 v1(144.8,89.4)
NetR12_2: R12.2 VD3.1
NetR13_2: R13.2 VT3.1 | length 2.4
  Top Layer w0.5: VT3.1 102.425,72.15 102.775,71.8 R13.2
NetR14_1: R14.1 VT4.1 VT5.3 | length 4.3
  Top Layer w0.5: VT5.3 102.049,90.224 102.262,90.437 VT4.1 103.001,91.3 103.326,91.625 R14.1
NetR15_1: R15.1 VT5.1 VT6.3 | length 1.7
  Top Layer w0.5: VT6.3 97.166,90.291 R15.1
NetR16_2: R16.2 VD5.1
NetR17_1: R17.1 XP6.3 | length 54.8
  Top Layer w0.5: v1(94.425,82.475) 96.425,82.475 97.675,83.725 R17.1
  Bottom Layer w0.5: XP6.3 65.9,84.7 67.8,82.8 67.8,74.031 73.606,68.225 84.3,68.225 90.498,74.423 90.498,79.825 93.148,82.475 v1(94.425,82.475)
NetR17_2: R17.2 VT6.1 | length 1.8
  Top Layer w0.5: R17.2 96.15,84.524 VT6.1
NetR18_2: R18.2 VD7.1
NetR19_2: R19.2 VD9.1 | length 2.4
  Top Layer w0.5: VD9.1 86.475,92.926 R19.2
NetR20_2: R20.2 VD11.1 | length 2.2
  Top Layer w0.5: R20.2 VD11.1
NetVD3_2: VD3.2 VD4.1
NetVD5_2: VD5.2 VD6.1
NetVD7_2: VD7.2 VD8.1
NetVD9_2: VD9.2 VD10.1
NetVD11_2: VD11.2 VD12.1
NetVT3_3: VT3.3 XP5.3 | length 2.4
  Top Layer w0.5: VT3.3 101.409,68.111 XP5.3
RESET: C9.2 DD1.19 R1.1 XP2.10 | length 24.2
  Top Layer w0.2: XP2.10 109.575,84.825 111.725,82.675 111.725,81.4 114.175,78.95 v1(114.175,77.975) ; v1(116.125,74.95) 116.625,75.45 DD1.19
  Top Layer w0.5: C9.2 R1.1
  Bottom Layer w0.2: v1(111.55,70.6) 111.55,72.35 113.125,73.925 ; v1(114.175,77.975) 114.175,74.975 113.125,73.925 ; v1(116.125,74.95) 115.1,73.925 113.125,73.925
RF_N: C18.1 DD1.2 L6.1 | length 13
  Top Layer w0.2: DD1.2 123.475,73.45 123.65,73.625
  Top Layer w0.5: C18.1 133.15,72.1 L6.1
  Top Layer w0.9: 123.65,73.625 130.425,73.625 131.9,72.15 C18.1
RF_P: C14.1 DD1.1 L3.2 | length 13.6
  Top Layer w0.2: DD1.1 123.075,72.95 123.238,72.787 125.988,72.787 126.425,72.35
  Top Layer w0.5: L3.2 132.875,69.675 C14.1
  Top Layer w0.9: 126.425,72.35 129.075,69.7 C14.1
X32K_Q1: C10.1 DD1.4 QR1.2 | length 7.5
  Top Layer w0.2: DD1.4 125.225,74.45 125.9,75.125 QR1.2 125.9,77.6 126.25,77.95 C10.1
X32K_Q2: C11.1 DD1.5 QR1.1 | length 6.1
  Top Layer w0.2: DD1.5 124.575,74.95 125,75.375 QR1.1 125,77.45 124.575,77.876 C11.1
pads on no net: DA1.4 DD1.3 DD1.8 DD1.10 DD1.21 DD1.22 DD1.26 DD1.27 REPER1.1 REPER2.1 U1.5 U1.6 XP1.2 XP1.3 XP1.4 XP3.3 XP6.1

## Polygon pours and split planes (outlines as drawn)
GND on Top Layer "GND_L01_P036" (hatched Horizontal grid 0.2 track 0.2, remove dead copper, pour order 36): 147.2,63.7 63.2,63.7 63.2,95.7 147.2,95.7
+VBAT on Top Layer "+VBAT_L01_P024" (hatched Horizontal grid 0.2 track 0.2, remove dead copper, pour order 24): 120.725,91.975 106.75,91.975 103.6,88.825 103.6,84.025 104.525,83.1 106.475,83.1 107.05,83.675 107.05,87.7 108.7,89.35 120.675,89.35
NetR15_1 on Top Layer "NETR15_1_L01_P034" (hatched Horizontal grid 0.2 track 0.2, remove dead copper, pour order 34): 97.8,87.65 99.05,88.9 100.325,88.9 101.075,89.65 101.075,90.5 100.3,91.275 97.05,91.275 96.357,90.582 96.357,87.868 96.575,87.65
+3V3 on Top Layer "+3V3_L01_P032" (hatched Horizontal grid 0.2 track 0.2, remove dead copper, pour order 32): 111.775,77.825 112.325,78.375 112.325,80.2 110.875,81.65 107.8,81.65 107.35,81.2 107.35,78.15 107.675,77.825
+VBAT on Top Layer "+VBAT_L01_P030" (hatched Horizontal grid 0.2 track 0.2, remove dead copper, pour order 30): 104.925,92.425 104.925,90.2 107.2,91.725 107.2,93.775 105.925,95.05 101.75,95.05 101.175,94.475 101.175,92.825 101.575,92.425
+3V3_CAM on Top Layer "+3V3_CAM_L01_P028" (hatched Horizontal grid 0.2 track 0.2, remove dead copper, pour order 28): 98.15,78.9 97.55,79.5 94.337,79.5 93.95,79.113 93.95,76.975 95.05,75.875 98.1,75.875 98.1,76.2 98.15,76.25
+VBAT on Top Layer "+VBAT_L01_P026" (hatched Horizontal grid 0.2 track 0.2, remove dead copper, pour order 26): 103.6,84.025 103.6,82.425 101.2,80.025 101.2,78.175 101.75,77.625 103.375,77.625 104.6,76.4 104.6,74.825 105.1,74.325 106.425,74.325 106.875,74.775 106.875,78.225 105.475,79.625 105.475,81.525 107.05,83.1 107.05,83.675
+VBAT on Top Layer "+VBAT_L01_P022" (hatched Horizontal grid 0.2 track 0.2, remove dead copper, pour order 22): 130.175,81.4 128.925,82.65 128.925,90.275 127.225,91.975 120.725,91.975 120.075,91.325 120.075,89.95 120.675,89.35 122.6,89.35 126.625,85.325 126.625,82.3 128.85,80.075 128.85,78.775 129.475,78.15 130.85,78.15 131.35,78.65 131.35,80.4 130.55,81.2 130.275,81.3
+VBUS on Top Layer "+VBUS_L01_P020" (hatched Horizontal grid 0.2 track 0.2, remove dead copper, pour order 20): 141.7,83.625 142.1,83.225 142.1,81.2 140.975,80.075 137.675,80.075 137.375,80.375 137.375,81.4 137.75,81.775 139.025,81.775 139.375,82.125 139.375,83.575 139.425,83.625
NetVD9_2 on Top Layer "NETVD9_2_L01_P016" (hatched Horizontal grid 0.2 track 0.2, remove dead copper, pour order 16): 88.738,85.7 87.9,86.538 87.9,92 88.7,92.8 91.361,92.8 93.9,90.261 93.9,86.8 92.8,85.7
NetR18_2 on Top Layer "NETR18_2_L01_P014" (hatched Horizontal grid 0.2 track 0.2, remove dead copper, pour order 14): 90.7,76 93,76 93.5,76.5 93.5,78.676 92.376,79.8 90.5,79.8 89.5,78.8 89.5,76.45 89.9,76.05
NetVD7_2 on Top Layer "NETVD7_2_L01_P012" (hatched Horizontal grid 0.2 track 0.2, remove dead copper, pour order 12): 88.8,74.1 90.2,75.5 92.9,75.5 93.7,74.7 93.7,70.1 91.3,67.7 88.8,67.7
NetVD5_2 on Top Layer "NETVD5_2_L01_P010" (hatched Horizontal grid 0.2 track 0.2, remove dead copper, pour order 10): 78.8,67.8 76.85,69.75 75.312,69.75 74.162,70.9 72.7,70.9 72,70.2 72,65.2 73.2,64 78.2,64 78.8,64.6
NetR16_2 on Top Layer "NETR16_2_L01_P008" (hatched Horizontal grid 0.2 track 0.2, remove dead copper, pour order 8): 79.8,67.9 79.1,67.2 79.1,64.4 79.5,64 84.1,64 85.4,65.3 85.4,67.3 84.8,67.9
NetR12_2 on Top Layer "NETR12_2_L01_P006" (hatched Horizontal grid 0.2 track 0.2, remove dead copper, pour order 6): 67.5,78 68.85,78 69.5,77.35 69.5,73.438 68.612,72.55 67.15,72.55 66.5,73.2 66.5,77.3 66.9,77.7
NetVD3_2 on Top Layer "NETVD3_2_L01_P004" (hatched Horizontal grid 0.2 track 0.2, remove dead copper, pour order 4): 65.9,82 63.6,79.7 63.6,74.45 64.45,73.6 65.8,73.6 66.5,74.3 66.5,77.5 69.1,80.1 69.1,81.525 68.625,82
NetVD11_2 on Top Layer "NETVD11_2_L01_P002" (hatched Horizontal grid 0.2 track 0.2, remove dead copper, pour order 2): 70.375,90.5 70.375,91.891 70.884,92.4 72,92.4 75.1,95.5 76.7,95.5 77.5,94.7 77.5,93.1 76.1,91.7 76.1,90.35 74.362,88.612 71.188,88.612 70.4,89.4
GND on Bottom Layer "GND_L02_P040" (hatched Horizontal grid 0.2 track 0.2, remove dead copper, pour order 40): 147.2,63.7 63.2,63.7 63.2,95.7 147.2,95.7

## Keep-outs
Keep-Out Layer:
  circle w0.25: c79.2,79.7 r10
  lines w0.25: 95.2,95.7 63.2,95.7 63.2,63.7 97.075,63.7
  lines w0.254: 95.2,95.7 138,95.7 138,89.5 143.1,89.5 144.5,90.9 144.5,93.4 147.2,93.4 147.2,89.5 147.2,63.7 110.625,63.7 108.525,65.8 99.175,65.8 97.075,63.7

## Other copper
Top Layer:
  rectangle net GND: 140.525,78.233 141.575,79.75
  pour cut-out: 141.475,63.7 147.2,63.7 147.2,80.175 141.5,80.175 141.475,80.15
Bottom Layer:
  pour cut-out: 141.475,63.7 147.2,63.7 147.2,80.175 141.5,80.175 141.475,80.15

## Silkscreen, mask and mechanical layers (free items; w line width, h text height)
Top Overlay:
  text "PROG" at 112.05,88.325 h0.8
  text "BATTERY" at 129.6,87.7 h0.8 r90
  text "BLE CAMERA hv2" at 126.575,74.075 h0.8
  text "MOTION" at 108.125,68.075 h0.8
  text "SENSOR" at 108.125,65.5 h0.8